# EAGLE board Tecla Shield SMD (EAGLE 5.10)
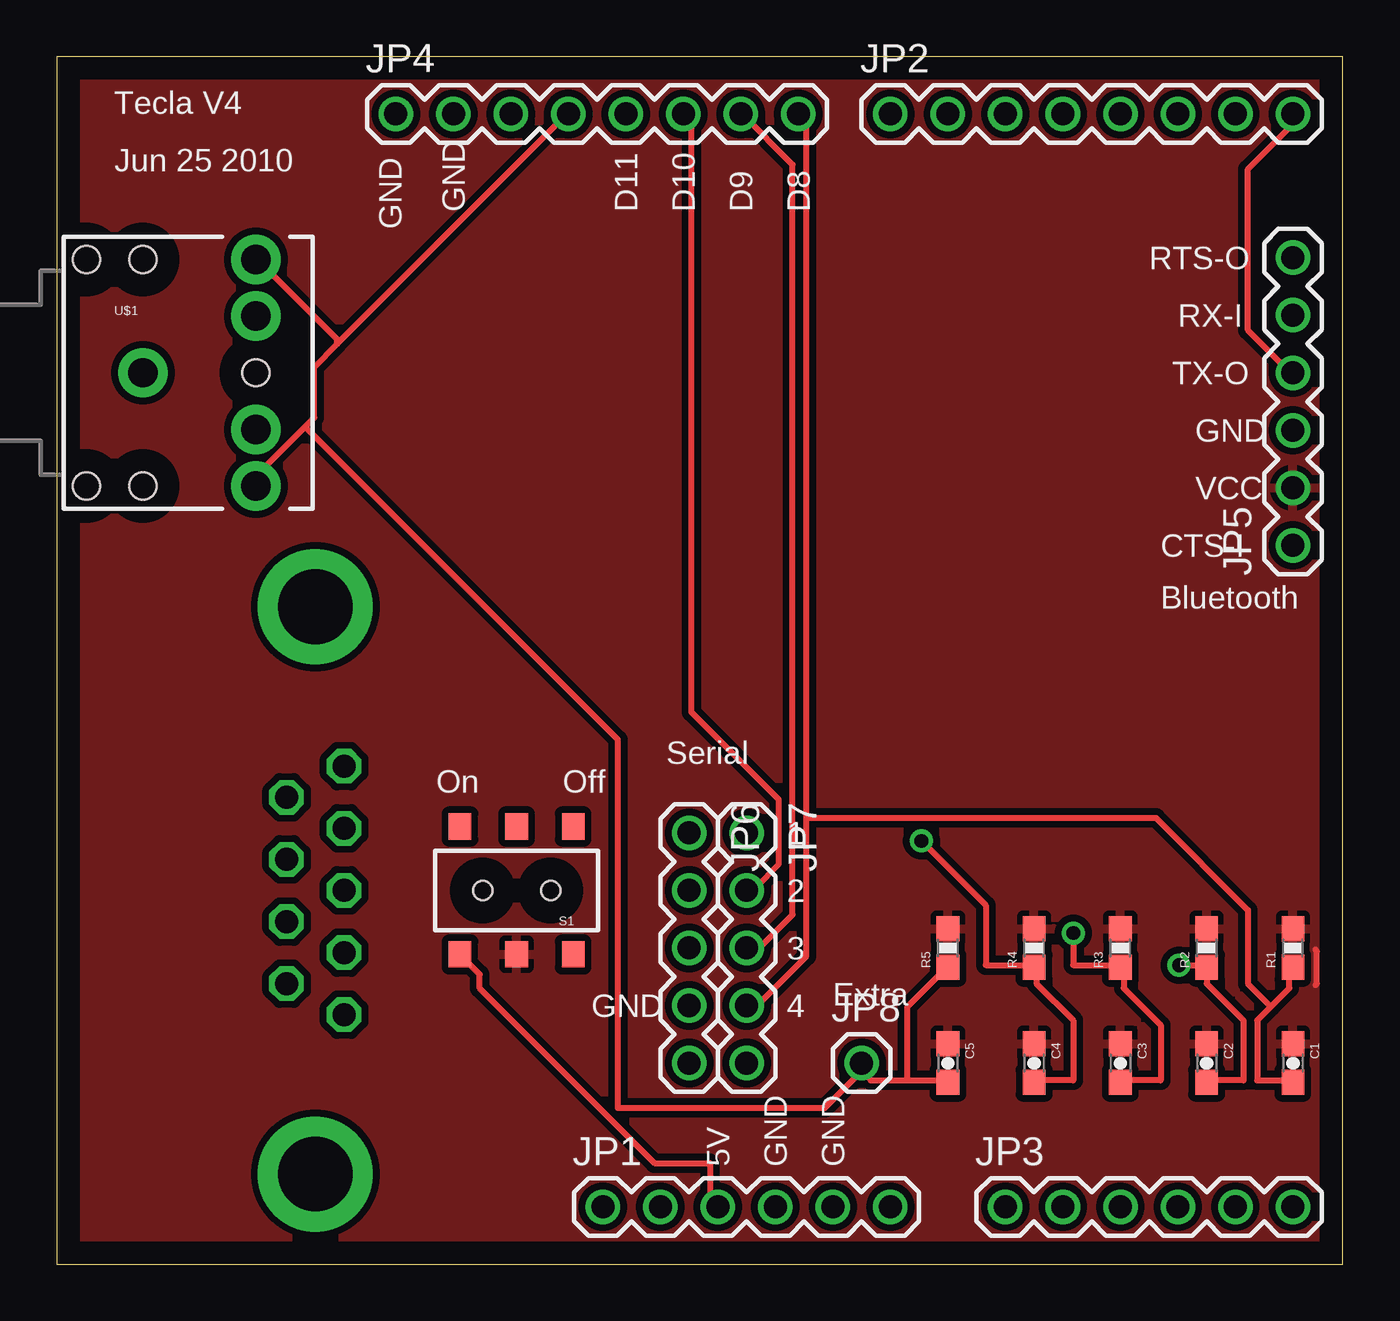
[diagram p0: board, top side]
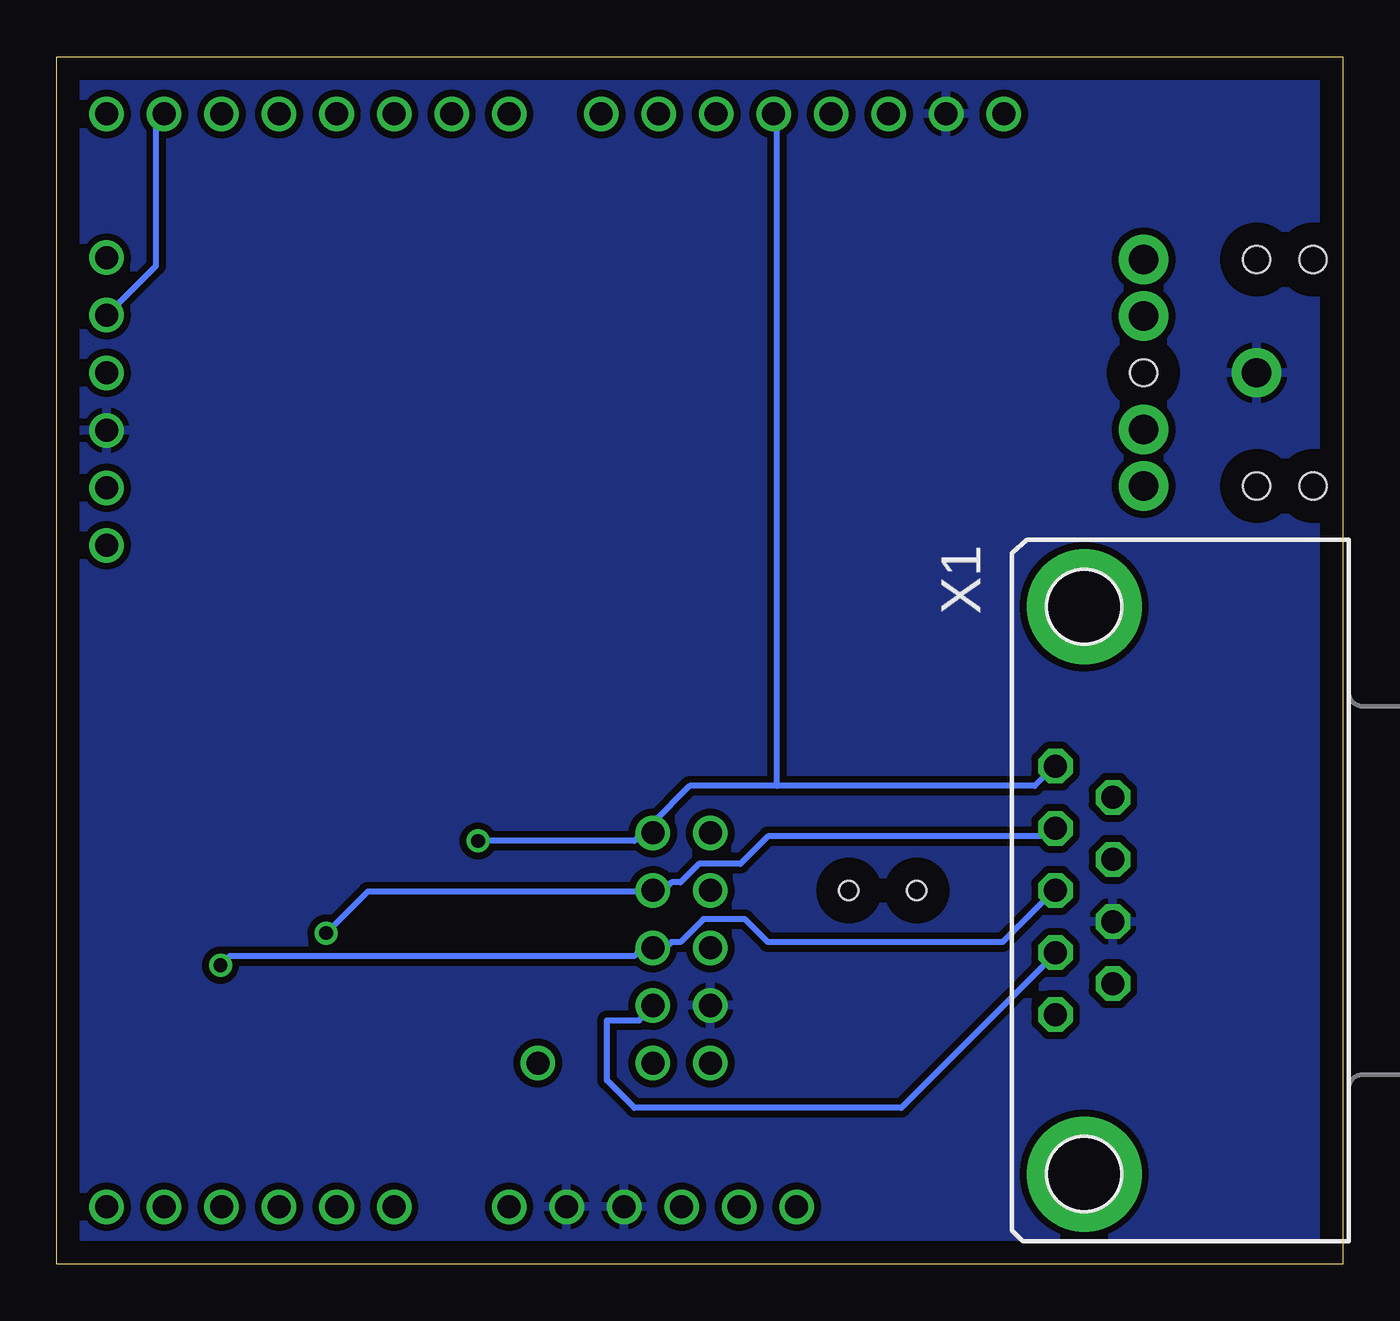
[diagram p1: board, bottom side, seen from below]

Size 56.82 x 53.33 mm. Coordinates in mm from the lower left corner, seen from the top.
Outline: 0,0 56.82,0 56.82,53.33 0,53.33 0,0
Copper layers (1*16): Top 0.035mm / dielectric 1.5mm / Bottom 0.035mm
Design rules "default *": minimum track width 10mil, minimum drill 24mil, track to track 8mil, track to pad 8mil, pad to pad 8mil, via to via 8mil, smd to smd 8mil, copper to edge 40mil, drill to drill 8mil, minimum pad ring 10mil, minimum via ring 8mil, stop-mask expansion 4mil, vias tented up to drill 0mil, thermal gap 10mil

## Footprints (pad centres in the part's own frame; a part is rotated, then mirrored left to right if it is on the bottom)
0603-CAP = smd 1.1 x 1: 1 -0.85,0; 2 0.85,0
1X06 = drill 1.016 round: 1 0,0; 2 2.54,0; 3 5.08,0; 4 7.62,0; 5 10.16,0; 6 12.7,0
1X08 = drill 1.016 round: 1 0,0; 2 2.54,0; 3 5.08,0; 4 7.62,0; 5 10.16,0; 6 12.7,0; 7 15.24,0; 8 17.78,0
1X05 = drill 1.016 round: 1 0,0; 2 2.54,0; 3 5.08,0; 4 7.62,0; 5 10.16,0
1X01 = drill 1.016 round: 1 0,0
0603-RES = smd 1.1 x 1: 1 -0.85,0; 2 0.85,0
AYZ0202 = smd 1 x 1.15: 1 -2.5,2.825; 2 0,2.825; 3 2.5,2.825; 4 -2.5,-2.825; 5 0,-2.825; 6 2.5,-2.825 | hole 0.85: 1.5,0; -1.5,0
AUDIO-JACK = drill 1.3 pad 2.184 round: 1 0,0; 2 5,5; 3 5,2.5; 4 5,-2.5; 5 5,-5 | hole 1.2: 0,5; -2.5,5; -2.5,-5; 0,-5; 5,0
DB9 = drill 1.016 octagon: 1 -5.486,-1.27; 2 -2.743,-1.27; 3 0,-1.27; 4 2.743,-1.27; 5 5.486,-1.27; 6 -4.115,1.27; 7 -1.372,1.27; 8 1.372,1.27; 9 4.115,1.27 | drill 3.302 pad 5.08 round: G1 -12.522,0; G2 12.522,0

## Placement (x,y rotation side)
C1  0.47uF  [0603-CAP]  54.61,8.89 270 top
C2  0.47uF  [0603-CAP]  50.8,8.89 270 top
C3  0.47uF  [0603-CAP]  46.99,8.89 270 top
C4  0.47uF  [0603-CAP]  43.18,8.89 270 top
C5  0.47uF  [0603-CAP]  39.37,8.89 270 top
JP1  Power  [1X06]  24.13,2.54 0 top
JP2  Digital1  [1X08]  36.83,50.8 0 top
JP3  Analog  [1X06]  41.91,2.54 0 top
JP4  Digital2  [1X08]  14.99,50.8 0 top
JP5  Bluetooth  [1X06]  54.61,31.75 90 top
JP6  Serial1  [1X05]  27.94,19.05 270 top
JP7  Serial2  [1X05]  30.48,19.05 270 top
JP8  Extra Pin  [1X01]  35.56,8.89 0 top
R1  1K  [0603-RES]  54.61,13.97 90 top
R2  1K  [0603-RES]  50.8,13.97 90 top
R3  1K  [0603-RES]  46.99,13.97 90 top
R4  1K  [0603-RES]  43.18,13.97 90 top
R5  1K  [0603-RES]  39.37,13.97 90 top
S1  [AYZ0202]  20.32,16.51 180 top
U$1  AUDIO-JACKPTH  [AUDIO-JACK]  3.81,39.37 0 top
X1  Serial  [DB9]  11.43,16.51 270 bottom

## Library data of the parts
C1-C5 R1-R5 S1 U$1 = SparkFun
JP1-JP8 X1 = SparkFun-3-2-07

## Nets
+5V: C1.1 C2.1 C3.1 C4.1 C5.1 JP5.2 R1.2 R2.2 R3.2 R4.2 R5.2 S1.2
N$1: JP2.8 JP5.4
N$2: JP2.7 JP5.5
N$3: JP1.3 S1.3
N$4: C3.2 JP4.6 JP7.2 R3.1 X1.2
N$5: C4.2 JP4.5 JP7.1 R4.1 X1.1
N$6: C5.2 JP4.4 JP8.1 R5.1 U$1.2 U$1.5
N$16: C1.2 JP4.8 JP7.4 R1.1 X1.4
PE: JP1.4 JP1.5 JP4.2 JP5.3 JP6.4 U$1.1 X1.8
X1: C2.2 JP4.7 JP7.3 R2.1 X1.3

## Tracks (layer width: path | path; a pad name or v marks a point on that pad's centre or on a via)
+5V
  Top 0.254: 55.6,12.34 55.68,12.39 55.68,13.82 55.6,13.9
  pour Top (isolate 0.305): 0,53.34 57.15,53.34 57.15,-1.27 0,-1.27
N$1
  Top 0.254: JP5.4 54.46,39.42 52.63,41.25 52.63,48.36 54.46,50.19 54.46,50.8 JP2.8
N$2
  Bottom 0.254: JP5.5 52.43,44.09 52.43,50.8 JP2.7
N$3
  Top 0.254: S1.3 17.88,13.61 18.69,12.8 18.69,12.19 26.42,4.47 28.85,4.47 28.85,2.85 29.06,2.64 JP1.3
N$4  (via drill 0.61)
  Top 0.254: C3.2 47.14,8.13 48.77,8.13 48.77,10.57 47.14,12.19 47.14,13.01 R3.1 46.94,13.21 44.91,13.21 v44.91,14.63 | JP4.6 27.84,50.8 28.04,50.6 28.04,24.38 31.9,20.52 31.9,17.68 30.89,16.66 30.48,16.66 JP7.2
  Bottom 0.254: X1.2 12.8,19.1 13.01,18.9 25.4,18.9 26.62,17.68 28.45,17.68 29.26,16.87 29.67,16.87 29.87,16.66 30.48,16.66 JP7.2 30.48,16.46 43.08,16.46 v44.91,14.63
N$5  (via drill 0.61)
  Top 0.254: C4.2 43.28,8.13 44.91,8.13 44.91,10.77 43.28,12.39 43.28,13.01 R4.1 43.08,13.21 41.05,13.21 41.05,15.85 v38.2,18.69
  Bottom 0.254: 24.99,21.13 28.85,21.13 30.48,19.51 JP7.1 30.48,18.9 31.09,18.9 31.29,18.69 v38.2,18.69 | 24.99,21.13 13.61,21.13 12.8,21.95 X1.1 | 24.99,21.13 24.99,50.8 JP4.5
N$6
  Top 0.254: 37.59,8.13 35.97,8.13 35.56,8.53 | 37.59,8.13 39.22,8.13 C5.2 | 35.56,8.53 JP8.1 35.56,8.74 | 37.59,8.13 37.59,11.38 39.22,13.01 R5.1 | 12.39,40.64 11.38,39.62 11.38,37.39 10.97,36.98 | 12.39,40.64 22.55,50.8 JP4.4 | 10.97,36.98 8.94,34.95 8.94,34.54 U$1.5 | 35.56,8.53 33.93,6.91 24.79,6.91 24.79,23.16 10.97,36.98 | 12.39,40.64 12.39,40.84 8.94,44.3 U$1.2
N$16
  Top 0.254: 53.65,11.38 54.46,12.19 54.46,13.01 R1.1 | 53.65,11.38 53.03,10.77 53.03,8.13 54.46,8.13 C1.2 | 33.12,19.71 33.12,13.61 31.09,11.58 30.48,11.58 JP7.4 | 33.12,19.71 33.12,50.6 32.92,50.8 JP4.8 | 53.65,11.38 52.63,12.39 52.63,15.65 48.56,19.71 33.12,19.71
  Bottom 0.254: X1.4 12.8,13.61 19.51,6.91 31.29,6.91 32.51,8.13 32.51,10.77 31.09,10.77 30.48,11.38 JP7.4
PE
  pour Bottom (isolate 0.305): 0,53.34 57.15,53.34 57.15,0 0,0 0,52.07
X1  (via drill 0.61)
  Top 0.254: C2.2 50.8,8.13 52.43,8.13 52.43,10.77 50.8,12.39 R2.1 50.8,13.21 v49.58,13.21 | JP4.7 30.28,50.8 32.51,48.56 32.51,15.44 31.09,14.02 30.48,14.02 JP7.3
  Bottom 0.254: X1.3 12.8,16.46 15.04,14.22 25.4,14.22 26.42,15.24 28.25,15.24 29.26,14.22 29.67,14.22 29.87,14.02 30.48,14.02 JP7.3 30.48,13.82 31.09,13.82 31.29,13.61 49.17,13.61 v49.58,13.21

## Text on the board
tPlace: Tecla V4 | Jun 25 2010 | GND | GND | D11 | D10 | D9 | D8 | RTS-O | RX-I | TX-O | GND | VCC | CTS-I | Bluetooth | Serial | On | Off | 1 | 2 | 3 | GND | 4 | Extra | 5V | GND | GND